# Altium PCB mach_sac_acquy.PcbDoc
Units mil, origin at the board's own origin, x right, y up, seen from the top; angles counter-clockwise.
Board outline 2750 x 1500 mil, 2 copper layers (Top Layer, Bottom Layer); 31 components, 17 nets, 109 pads, 3 vias.
Unrouted connection lines stored in the file: 1.
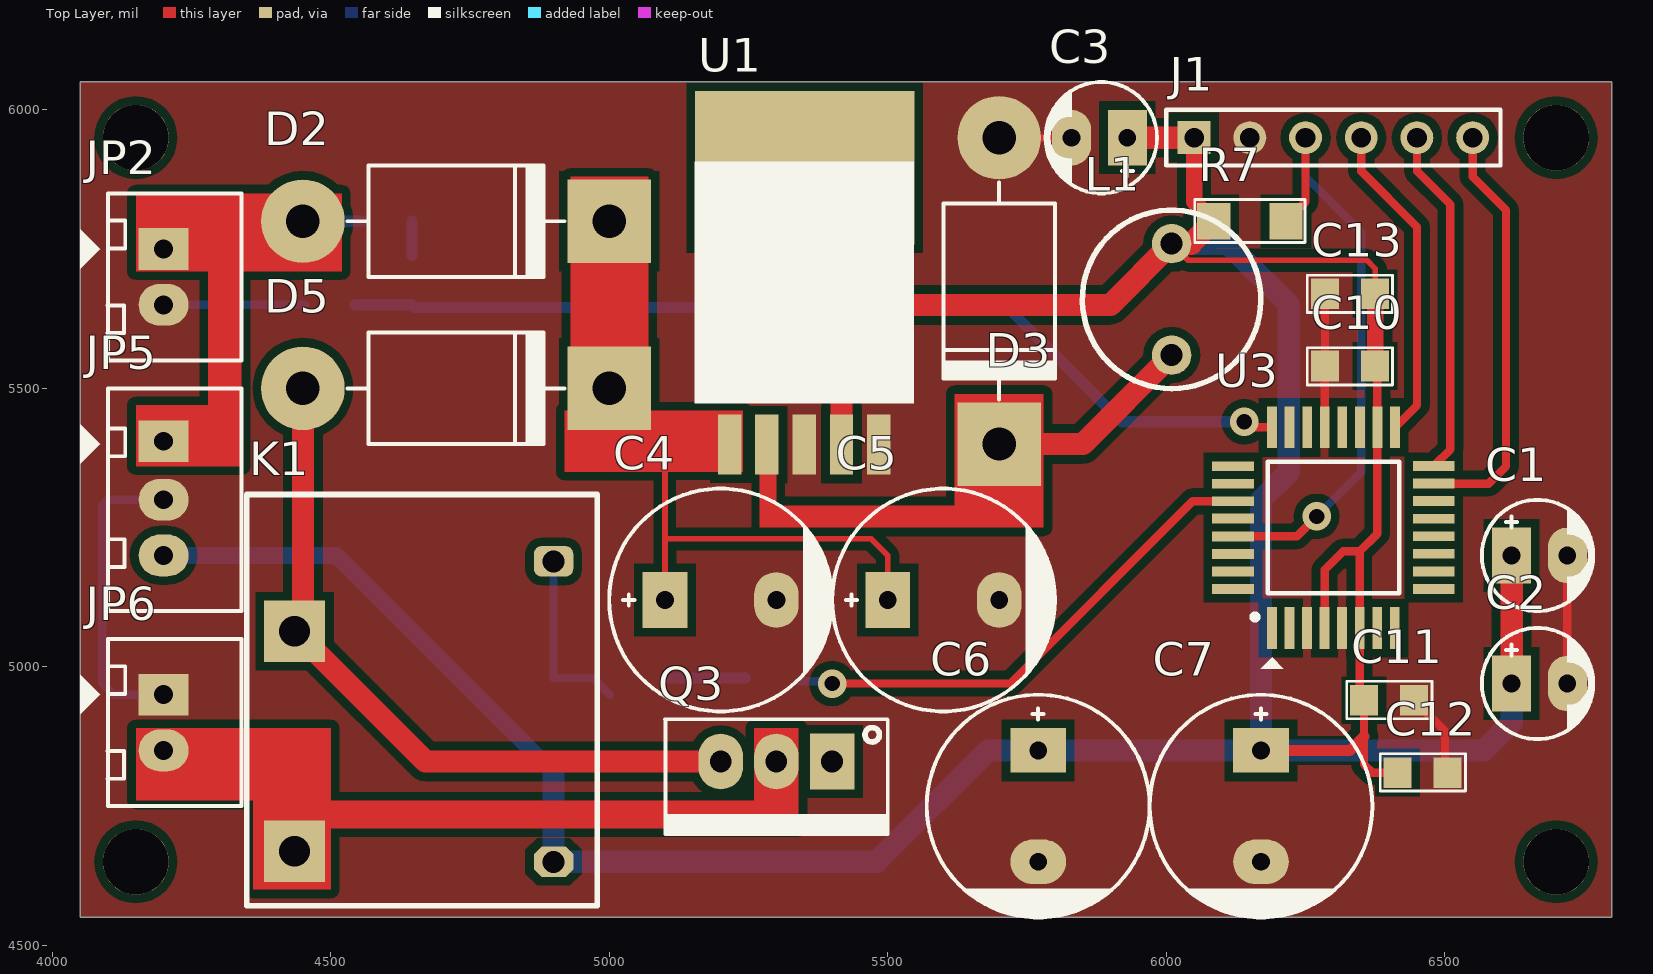
[diagram p0: Top Layer view]
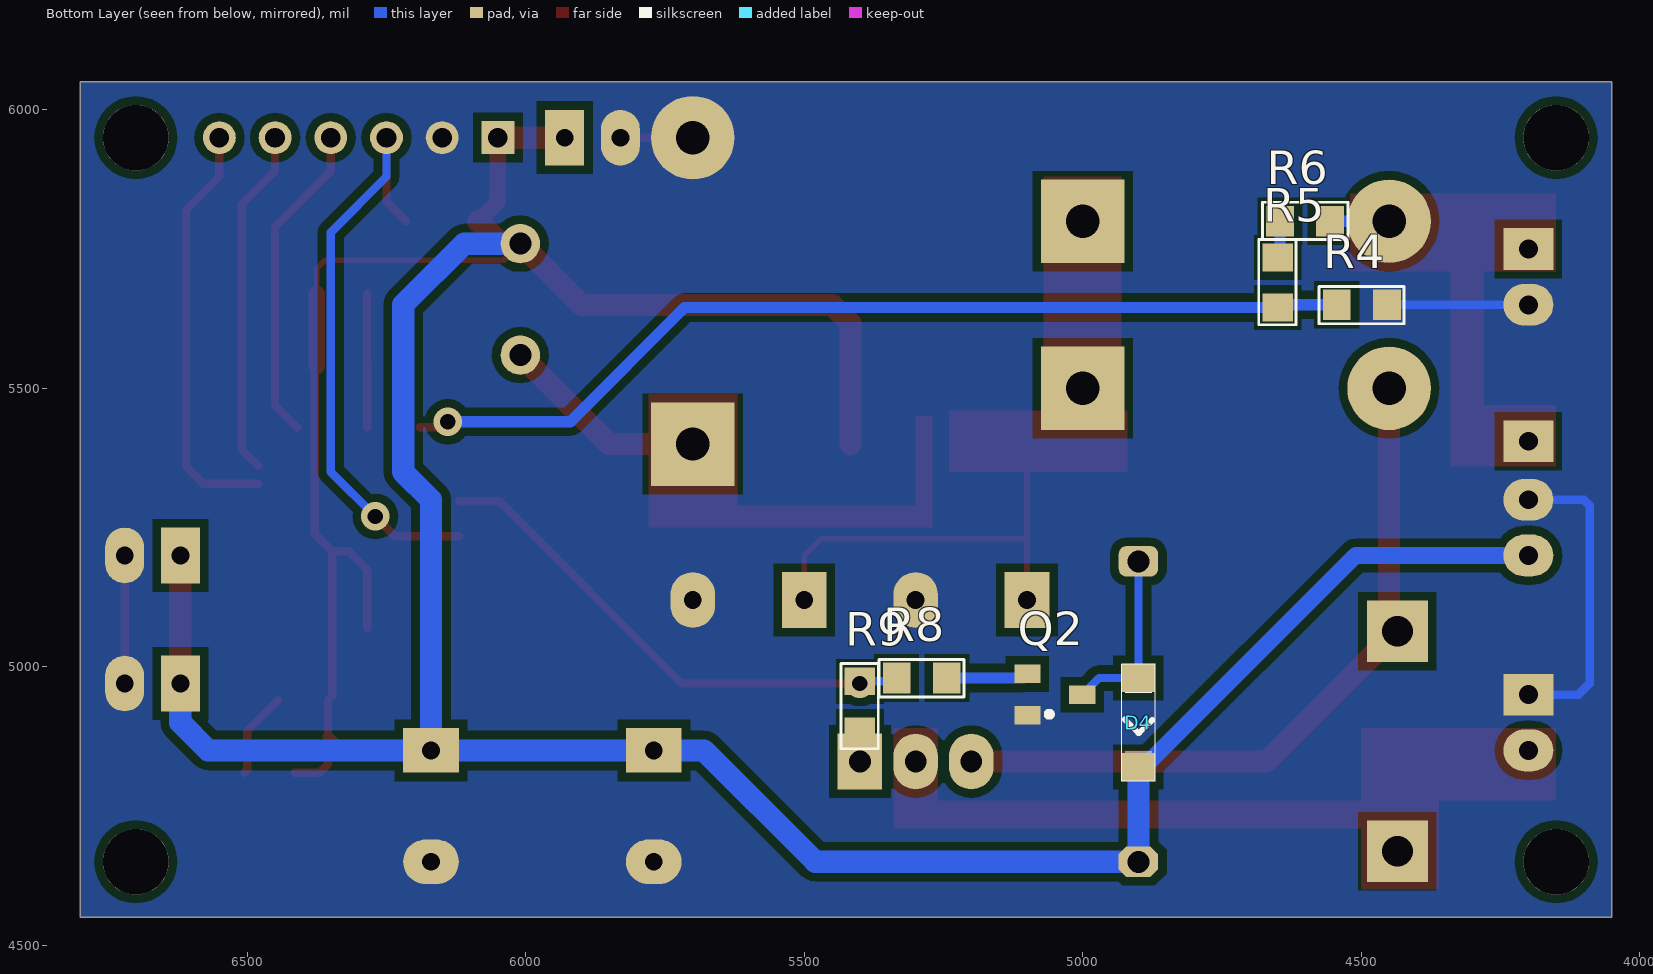
[diagram p1: Bottom Layer view, seen from below]
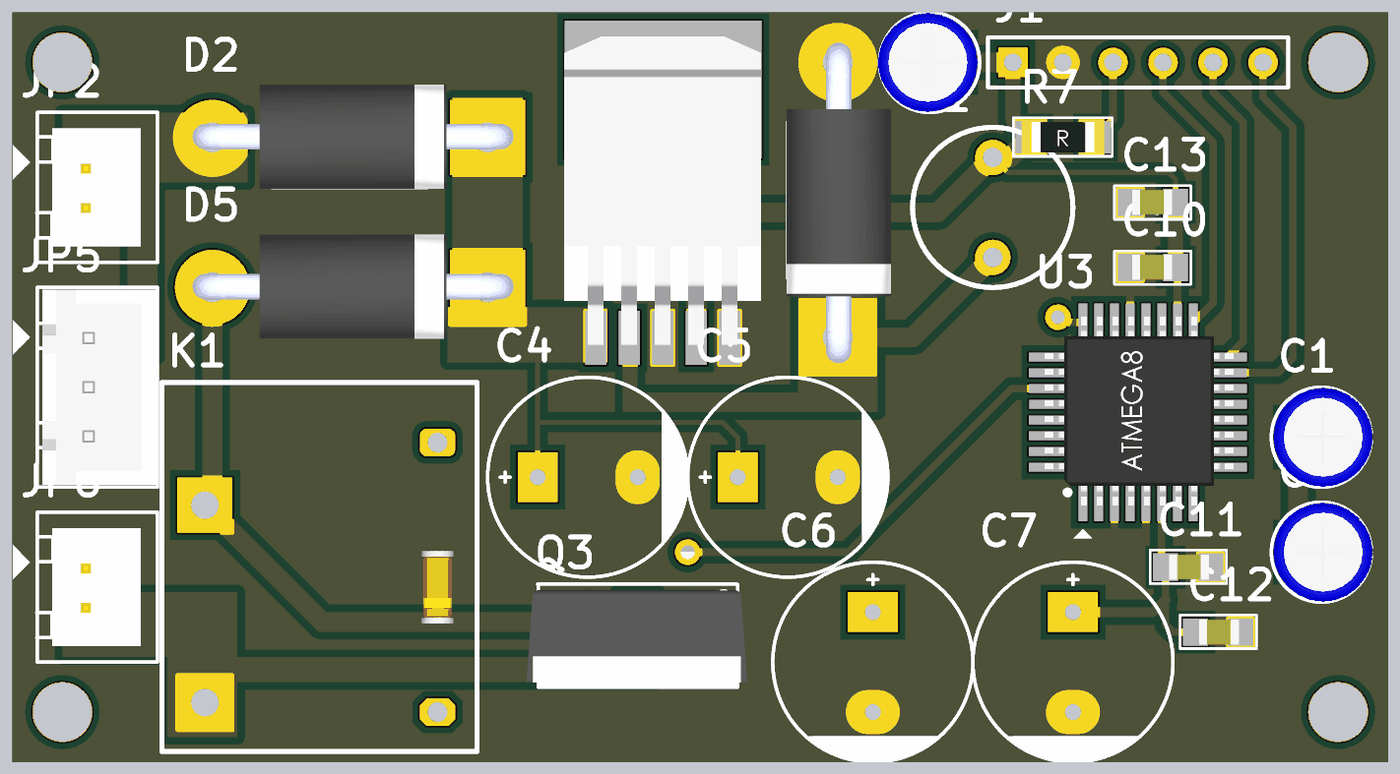
[diagram p2: 3D render of the assembled board from above, using the file's embedded part models]
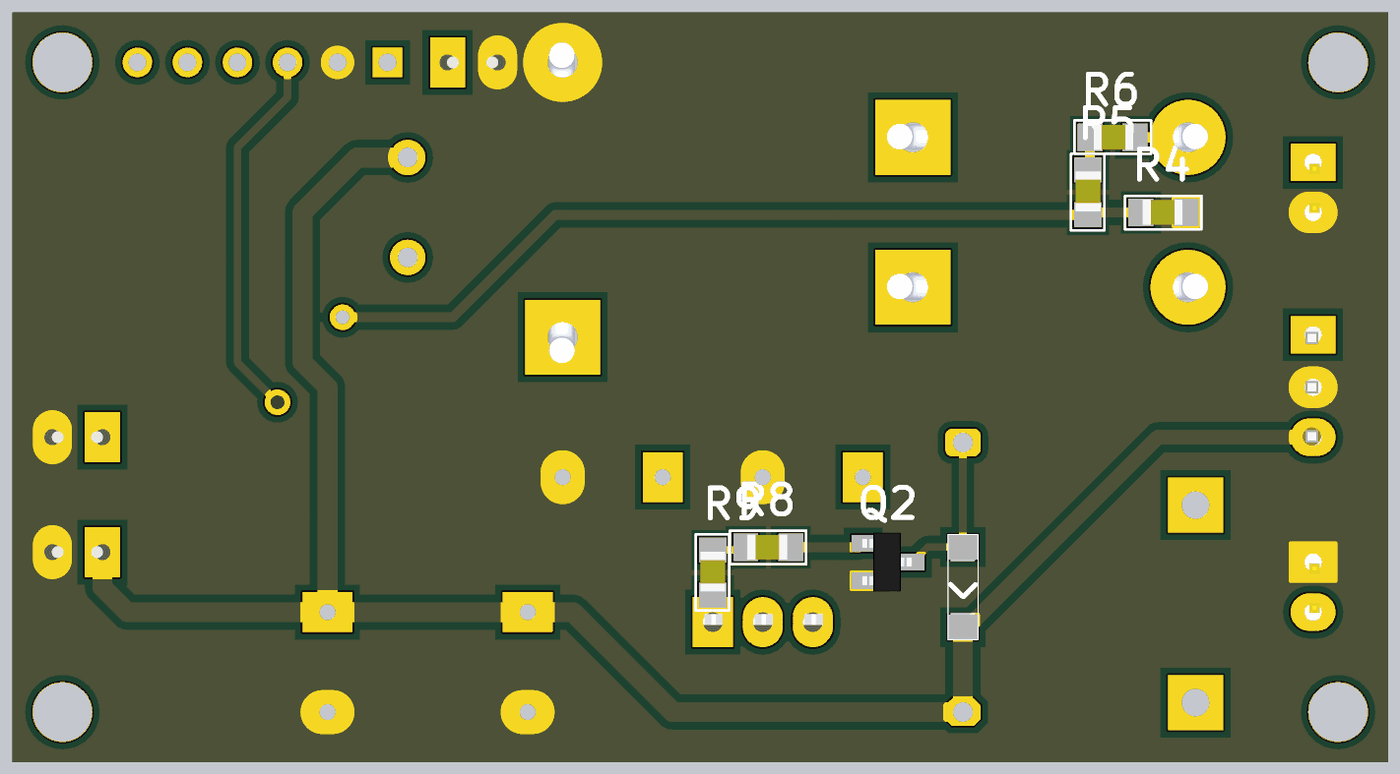
[diagram p3: 3D render of the assembled board from below, using the file's embedded part models]

## Layer stack, top to bottom
Top Layer: signal copper 1.4
Dielectric: dielectric 12.6, FR-4, Dk 4.8
Bottom Layer: signal copper 1.4

## Board outline
4050,6050 6800,6050 6800,4550 4050,4550

## Design rules (kind name [scope] priority, off if disabled: settings)
Clearance [All] p1: gap=15
PlaneConnect [All] p1: planeconnectstyle=Direct reliefexpansion=20 reliefentries=4 reliefconductorwidth=10 reliefairgap=10
PolygonConnect [All] p1: connectstyle=Direct reliefconductorwidth=10 reliefentries=4 polygonreliefangle="90 Angle"
RoomDefinition mach_sac_acquy [InComponentClass('mach_sac_acquy')] p1: confinementstyle=ConfineIn formatcopy=TRUE lockcomponents=FALSE outline 0,0 2000,0 2000,1000 0,1000
RoutingVias [All] p1: holewidth=28 width=50 viastyle="Through Hole" minholewidth=28 minwidth=50 maxholewidth=28 maxwidth=50
SilkscreenOverComponentPads [IsPad] p1: minsilkscreentomaskgap=10
SolderMaskExpansion [All] p1: expansion=4
Width [All] p1: maxlimit=100 minlimit=10 preferedwidth=20
26 further rules are at their usual default settings.

## Components (designator, comment, footprint, x,y, rotation, side; value= is the part's Value field where it differs from the comment)
C1 "1000uF" CP1/2 6620,5200 r0 top
C2 "1000uF" CP1/2 6620,4970 r0 top
C3 "1000uF" CP1/2 5930,5950 r180 top
C4 "1000uF" CP2/4 5100,5120 r0 top
C5 "1000uF" CP2/4 5500,5120 r0 top
C6 "1000uF" CP2/4 5770,4850 r270 top
C7 "1000uF" CP2/4 6170,4850 r270 top
C10 "104" SM-0805 6330,5540 r0 top
C11 "104" SM-0805 6400,4940 r180 top
C12 "104" SM-0805 6460,4810 r180 top
C13 "104" SM-0805 6330,5670 r0 top
D2 "1N5822" D5A 5000,5800 r180 top
D3 "1N5822" D5A 5700,5400 r90 top
D4 "1N4148" "1n4148 smd" 4900,4900 r270 bottom
D5 "1N5822" D5A 5000,5500 r180 top
J1 "Connector 5" HDR1X6 6050,5950 r0 top
JP2 "Connector 2" CON2 4200,5750 r270 top
JP5 "Connector 3" CON3 4200,5400 r270 top
JP6 "Connector 2" CON2 4200,4950 r270 top
K1 "RELAY SPNO" "RELAY SONGCHUAN 834" 4900,4650 r90 top
L1 "100uH" Inductor200 6010,5559.73 r90 top
Q2 "C1815" SOT23B 5050,4950 r270 bottom
Q3 "IRF840" QTO-220 5400,4830 r180 top
R4 "1K" SM-0805 4499,5650 r180 bottom
R5 "1K" SM-0805 4650,5690 r270 bottom
R6 "1K" SM-0805 4601,5800 r0 bottom
R7 "10k" SM-1206 6150,5800 r0 top
R8 "2k2" SM-0805 5289,4980 r180 bottom
R9 "2k2" SM-0805 5400,4929 r270 bottom
U1 "LM2576T-5.0" TO263-5 5350,5400 r0 top
U3 "ATmega8L-8AI" QFP7X7-G32/X.45N 6300,5250 r90 top

## Footprints (in the part's own frame and the unit in brackets; to place one, negate y for a bottom-side part, rotate by r counter-clockwise, add the part's x,y. Pads: shape width x height; smd on the part's side, far side on the other; paste and mask are expansions set on the pad)
"1n4148 smd" [mil]
  rect 50x60 smd: 1(-80,0) 2(80,0)
  silkscreen extent -105,-30 105,30, body extent -73,-31 73,31
CON2 [mil] "CON2"
  rect 75x90 hole 34: 1(0,0)
  oval 75x90 hole 34: 2(100,0)
  silkscreen extent -100,-150 200,140, body extent -68,-70 168,107, height 236
CON3 [mil] "CON 3"
  rect 75x90 hole 34: 1(-5,0)
  oval 75x90 hole 34: 2(100,0) 3(200,0)
  silkscreen extent -100,-150 300,140, body extent -95,-90 295,136, height 276
CP1/2 [mil] "Tu hoa < 22uF/16>50V"
  rect 70x100 hole 32: 1(0,0)
  oval 70x100 hole 32: 2(100,0)
  silkscreen extent -53,-100 147,100, body extent -49,-99 149,99, height 287
CP2/4 [mil] "Tu hoa 1000uF/16V/25V"
  rect 80x100 hole 32: 1(0,0)
  oval 80x100 hole 32: 2(200,0)
  silkscreen extent -100,-200 300,200
D5A [mil] "Diode 5A, W 200mil, L 550mil"
  round 150 hole 60: 1(550,0)
  rect 150x150 hole 60: 2(0,0)
  silkscreen extent 80,-100 470,100, body extent -52,-106 590,103, height 254
HDR1X6 [mm] "Connector; Header; 6 Position"
  rect 1.5x1.5 hole 0.9: 1(0,0)
  round 1.5 hole 0.9: 2(2.54,0) 3(5.08,0) 4(7.62,0) 5(10.16,0) 6(12.7,0)
  silkscreen extent -1.27,-1.27 13.97,1.27, body extent -1.27,-1.27 13.97,1.27, height 7
Inductor200 [mm] "Inductor for switching power supply, pitch 200mil"
  round 1.8 hole 1: 1(0.001,0.008) 2(5.081,0.008)
  silkscreen extent -1.53,-4.06 6.61,4.08
QFP7X7-G32/X.45N [mm] "QFP; 32 Leads; Body 7 x 7 mm; Pitch 0.8 mm"
  rect 1.905x0.45 smd: 1(-4.583,2.8) 2(-4.583,2) 3(-4.583,1.2) 4(-4.583,0.4) 5(-4.583,-0.4) 6(-4.583,-1.2) 7(-4.583,-2) 8(-4.583,-2.8) 17(4.572,-2.806) 18(4.572,-2.006) 19(4.572,-1.206) 20(4.572,-0.406) 21(4.572,0.394) 22(4.572,1.194) 23(4.572,1.994) 24(4.572,2.794)
  rect 0.45x1.905 smd: 9(-2.794,-4.572) 10(-1.994,-4.572) 11(-1.194,-4.572) 12(-0.394,-4.572) 13(0.406,-4.572) 14(1.206,-4.572) 15(2.006,-4.572) 16(2.806,-4.572) 25(2.8,4.583) 26(2,4.583) 27(1.2,4.583) 28(0.406,4.572) 29(-0.4,4.583) 30(-1.2,4.583) 31(-2,4.583) 32(-2.8,4.583)
  silkscreen extent -6.43,-3 3,3.7, body extent -4.74,-4.86 4.86,4.74, height 1.13
QTO-220 [mil] "TO-220 - 1-2-3"
  rect 80x100 hole 39: 1(0,0)
  oval 80x100 hole 39: 2(100,0) 3(200,0)
  silkscreen extent -100,-76 300,130, body extent -119,-64 322,121, height 755
"RELAY SONGCHUAN 834" [mm]
  oct 1.4x1.8 hole 1: 1(0,0)
  rrect50% 1.4x1.8 hole 1: 2(13.7,0)
  rect 2.794x2.794 hole 1.4: 3(10.516,11.811) 4(0.483,11.811)
  silkscreen extent -2,-2 16.75,14, body extent -2,-2 16.75,14, height 11
SM-0805 [mil] "Compoment SMD 80x50mil"
  rect 50x55 smd: 1(-45,0) 2(45,0)
  silkscreen extent -77,-34 76,33, body extent -42,-25 38,25, height 24
SM-1206 [mil] "Compoment SMD 120x60mil"
  rect 60x65 smd: 1(-65,0) 2(65,0)
  silkscreen extent -99,-38 99,39, body extent -83,-35 83,36, height 25
SOT23B [mm] "SOT 23B"
  rect 0.85x1.2 smd: 1(0.94,-1.245) 2(0,1.25) 3(-0.95,-1.25)
  silkscreen extent 0.77,-0.38 1.02,-0.13, body extent -1.5,-1.3 1.5,1.2, height 1.06
TO263-5 [mm] "LM2576-SMD"
  rect 1.07x2.75 smd: 1(-3.4,-0.025) 2(-1.7,-0.025) 3(0,-0.025) 4(1.7,-0.025) 5(3.4,-0.025)
  rect 10x7 smd: 6(0.025,12.598)
  silkscreen extent -5,1.85 5,12.88, body extent -5,-0.38 5,15.29, height 4.79

## Part data
C1 C2 C3 C4 C5 C6 C7: library part CP2, "C 47uF/50V , 220uF/16V"
C10 C11 C12 C13: library part CM, "Cap SMD"
D2 D3 D5: library part D5A, "Diode 5A"
D4: library part D1A, "Diode 1A"
J1: library part "header 6", "Header, 6-Pin"
JP2 JP6: library part CON2
JP5: library part CON3
K1: "SINGLE Pole Dual-Throw Relay"
L1: library part Inductor, "Inductor"
Q2: "NPN 600mW, ECB"
Q3: "MOSFET N - CHANNEL 500V - 0.75 - 8A - TO-220"
R4 R5 R6: library part "RES 0805 BUT", "Resistor"
R7 R8 R9: library part R, "Resistor 1/4W"
U1: "SIMPLE SWITCHER; 3A Step-Down Voltage Regulator"
U3: "8-Bit AVR Microcontroller with 8K Bytes of In-System Programmable Flash Memory"

## Free pads (board coordinates)
  round 118.11 hole 118.11: 0(4150,5950) 0(6700,4650) 1(4150,4650) 2(6700,5950)

## Via types
v1: diameter 51.18, hole 27.56, Top Layer to Bottom Layer, 3 vias

## Nets (pads, with @x,y where several pads share a name; then routed paths per layer and width w, separated by ;. In a path a pad name is that pad's centre, name@x,y a point inside that pad or via, vN(x,y) a via of type N, cw(c..) or ccw(c..) an arc to the next point about the centre after c; other vN are vias at no path point)
12VDC: D2.1 JP2.1 JP5.1 R6.1 | length 857.8
  Top Layer w10: JP5.1 4245,5405 4330,5490 4330,5800 ; JP2.1 4200,5760 4240,5800 4330,5800 ; D2.1 4330,5800
  Bottom Layer w20: D2.1 R6.1
+5V: C1.1 C2.1 C3.1 C6.1 C7.1 C10.2 C11.2 C12.2 C13.2 D4.2 J1.1 JP5.3 K1.1 L1.2 R7.1 U1.4 U3.4 U3.6 U3.18 | length 7197.6
  Top Layer w10: L1.2 6039.46,5730 6360,5730 6375,5715 C13.2
  Top Layer w15: U3.4 6284.25,5174.25 6317.24,5207.24 6347.24,5207.24 ; C11.2@6347.24,4947.76 U3.6 6347.24,5207.24 ; C11.2 6355,4875 6355,4825 6370,4810 C12.2 ; C10.2 6378.98,5536.02 U3.18 6378.98,5238.98 6347.24,5207.24
  Top Layer w20: C7.1 6330,4850 6355,4875
  Top Layer w30: J1.1 6050,5835 R7.1 ; C10.2 C13.2
  Top Layer w40: U1.4 5416.93,5616.93 5449.69,5649.69 5899.61,5649.69 L1.2 6044.77,5759.77 R7.1 ; C3.1 J1.1 ; C2.1 C1.1
  Bottom Layer w20: D4.2@4890,4820 D4.2
  Bottom Layer w30: JP5.3 4510,5200 D4.2@4890,4820
  Bottom Layer w40: D4.2 K1.1 5480,4650 5680,4850 C6.1 C7.1 ; L1.2 6110.23,5759.77 6220,5650 6220,5350 6170,5300 C7.1 ; C2.1 6620,4900 6570,4850 C7.1
AC_ON: R4.1 R5.2 U3.24 | length 1730.1
  Top Layer w15: v1(6140,5440) 6150,5430 U3.24
  Bottom Layer w20: R4.1 R5.2@4645,5650 ; R5.2 5715,5645 5920,5440 v1(6140,5440)
GND: C1.2 C2.2 C3.2 C4.2 C5.2 C6.2 C7.2 C10.1 C11.1 C12.1 C13.1 D3.1 J1.2 JP2.2 JP5.2 JP6.1 Q2.1 R4.2 U1.3 U1.5 U3.3 U3.5 U3.21 | length 1560.8
  Top Layer w15: D3.1 C3.2 ; U3.21 C10.1@6284.49,5539.49 ; C10.1 C13.1 ; C11.1 6500,4885 6500,4815 C12.1 ; C2.2 C1.2
  Bottom Layer w15: JP6.1 4110,4950 4090,4970 4090,5290 4100,5300 JP5.2 ; JP2.2 R4.2
MISO: J1.5 U3.16 | length 626.8
  Top Layer w15: J1.5 6450,5890 6510,5830 6510,5390.47 U3.16
MOSI: J1.6 U3.15 | length 757.7
  Top Layer w15: U3.15 6578.98,5328.98 6610,5360 6610,5820 6550,5880 J1.6
NetD3_2: D3.2 L1.1 U1.2 | length 1050.3
  Top Layer w10: U1.2 5283.07,5286.93 5310,5260 5690,5260 5700,5270 D3.2
  Top Layer w40: D3.2 5850.27,5400 L1.1@6009.87,5559.6
NetD4_1: D4.1 K1.2 Q2.2 | length 322.6
  Bottom Layer w15: K1.2 D4.1 4970.79,4980 Q2.2
NetD5_1: D5.1 K1.3 Q3.3 | length 1271.2
  Top Layer w10: Q3.3@5160,4830 Q3.3@5180,4810
  Top Layer w40: K1.3 4436,5064 4670,4830 Q3.3@5160,4830 ; K1.3@4450,5079 D5.1
NetQ2_3: Q2.3 R8.2 | length 137.4
  Bottom Layer w20: Q2.3@5106.61,4980 R8.2
NetQ3_1: Q3.1 R9.2
NetR5_1: R5.1 R6.2 | length 61
  Bottom Layer w20: R5.1@4646,5739 R6.2
RL1: R8.1 R9.1 U3.27 | length 915.1
  Top Layer w15: v1(5400,4970) 5720,4970 6047.24,5297.24 U3.27
  Bottom Layer w15: R8.1@5340,4974 R9.1
RST: J1.3 R7.2 U3.29 | length 1084.3
  Top Layer w15: U3.29 6234.25,5234.25 v1(6270,5270) ; R7.2 6250,5835 J1.3
  Bottom Layer w15: J1.3 6250,5880 6350,5780 6350,5350 v1(6270,5270)
SCK: J1.4 U3.17 | length 577.8
  Top Layer w15: J1.4 6350,5890 6450,5790 6450,5469.53 U3.17
V_BAT: JP6.2 K1.4 Q3.2 | length 1338.9
  Top Layer w10: JP6.2 4380,4850 4435,4795 K1.4 4506,4740 5250,4740 5300,4790 Q3.2
V_IN: C4.1 C5.1 D2.2 D5.2 U1.1 | length 1370.4
  Top Layer w10: D2.2 D5.2 5100,5400 ; C4.1@5100,5100 5100,5230 ; U1.1 5101,5399 5100,5400 ; C5.1@5500,5100 5500,5200 5470,5230 5100,5230 ; 5100,5230 5100,5400
pads on no net: U1.6 U3.1 U3.2 U3.7 U3.8 U3.9 U3.10 U3.11 U3.12 U3.13 U3.14 U3.19 U3.20 U3.22 U3.23 U3.25 U3.26 U3.28 U3.30 U3.31 U3.32

## Polygon pours and split planes (outlines as drawn)
GND on Bottom Layer "Bottom Layer-No Net" (solid, pour order 6): 6800,4600 6800,6050 4050,6050 4050,4550 6800,4550
GND on Top Layer "Bottom Layer-No Net" (solid, pour order 8): 6800,4550 6800,6050 4050,6050 4050,4550

## Other copper
Top Layer:
  rectangle net NetD3_2: 5620,5250 5780,5490
  rectangle net NetD3_2: 5300,5250 5780,5290
  rectangle net NetD3_2: 5270,5250 5300,5450
  rectangle net V_IN: 4920,5350 5240,5460
  rectangle net V_IN: 4930,5430 5070,5880
  rectangle net V_BAT: 5260,4710 5340,4890
  rectangle net V_BAT: 4500,4710 5340,4760
  rectangle net V_BAT: 4360,4600 4500,4760
  rectangle net V_BAT: 4150,4760 4500,4890
  rectangle net 12VDC: 4150,5360 4340,5470
  rectangle net 12VDC: 4280,5370 4340,5710
  rectangle net 12VDC: 4150,5710 4520,5850